# Altium PCB PX4FMUv2.4.6.PcbDoc (part 3 of 3)
Units mil, origin at the board's own origin, x right, y up, seen from the top; angles counter-clockwise.
Board outline 2756 x 1595 mil, 6 copper layers (Top, Ground, Horizontal, Vertical, Power, Bottom), stack 65.355 mil thick; 290 components, 261 nets, 1159 pads, 472 vias.
Unrouted connection lines stored in the file: 14.
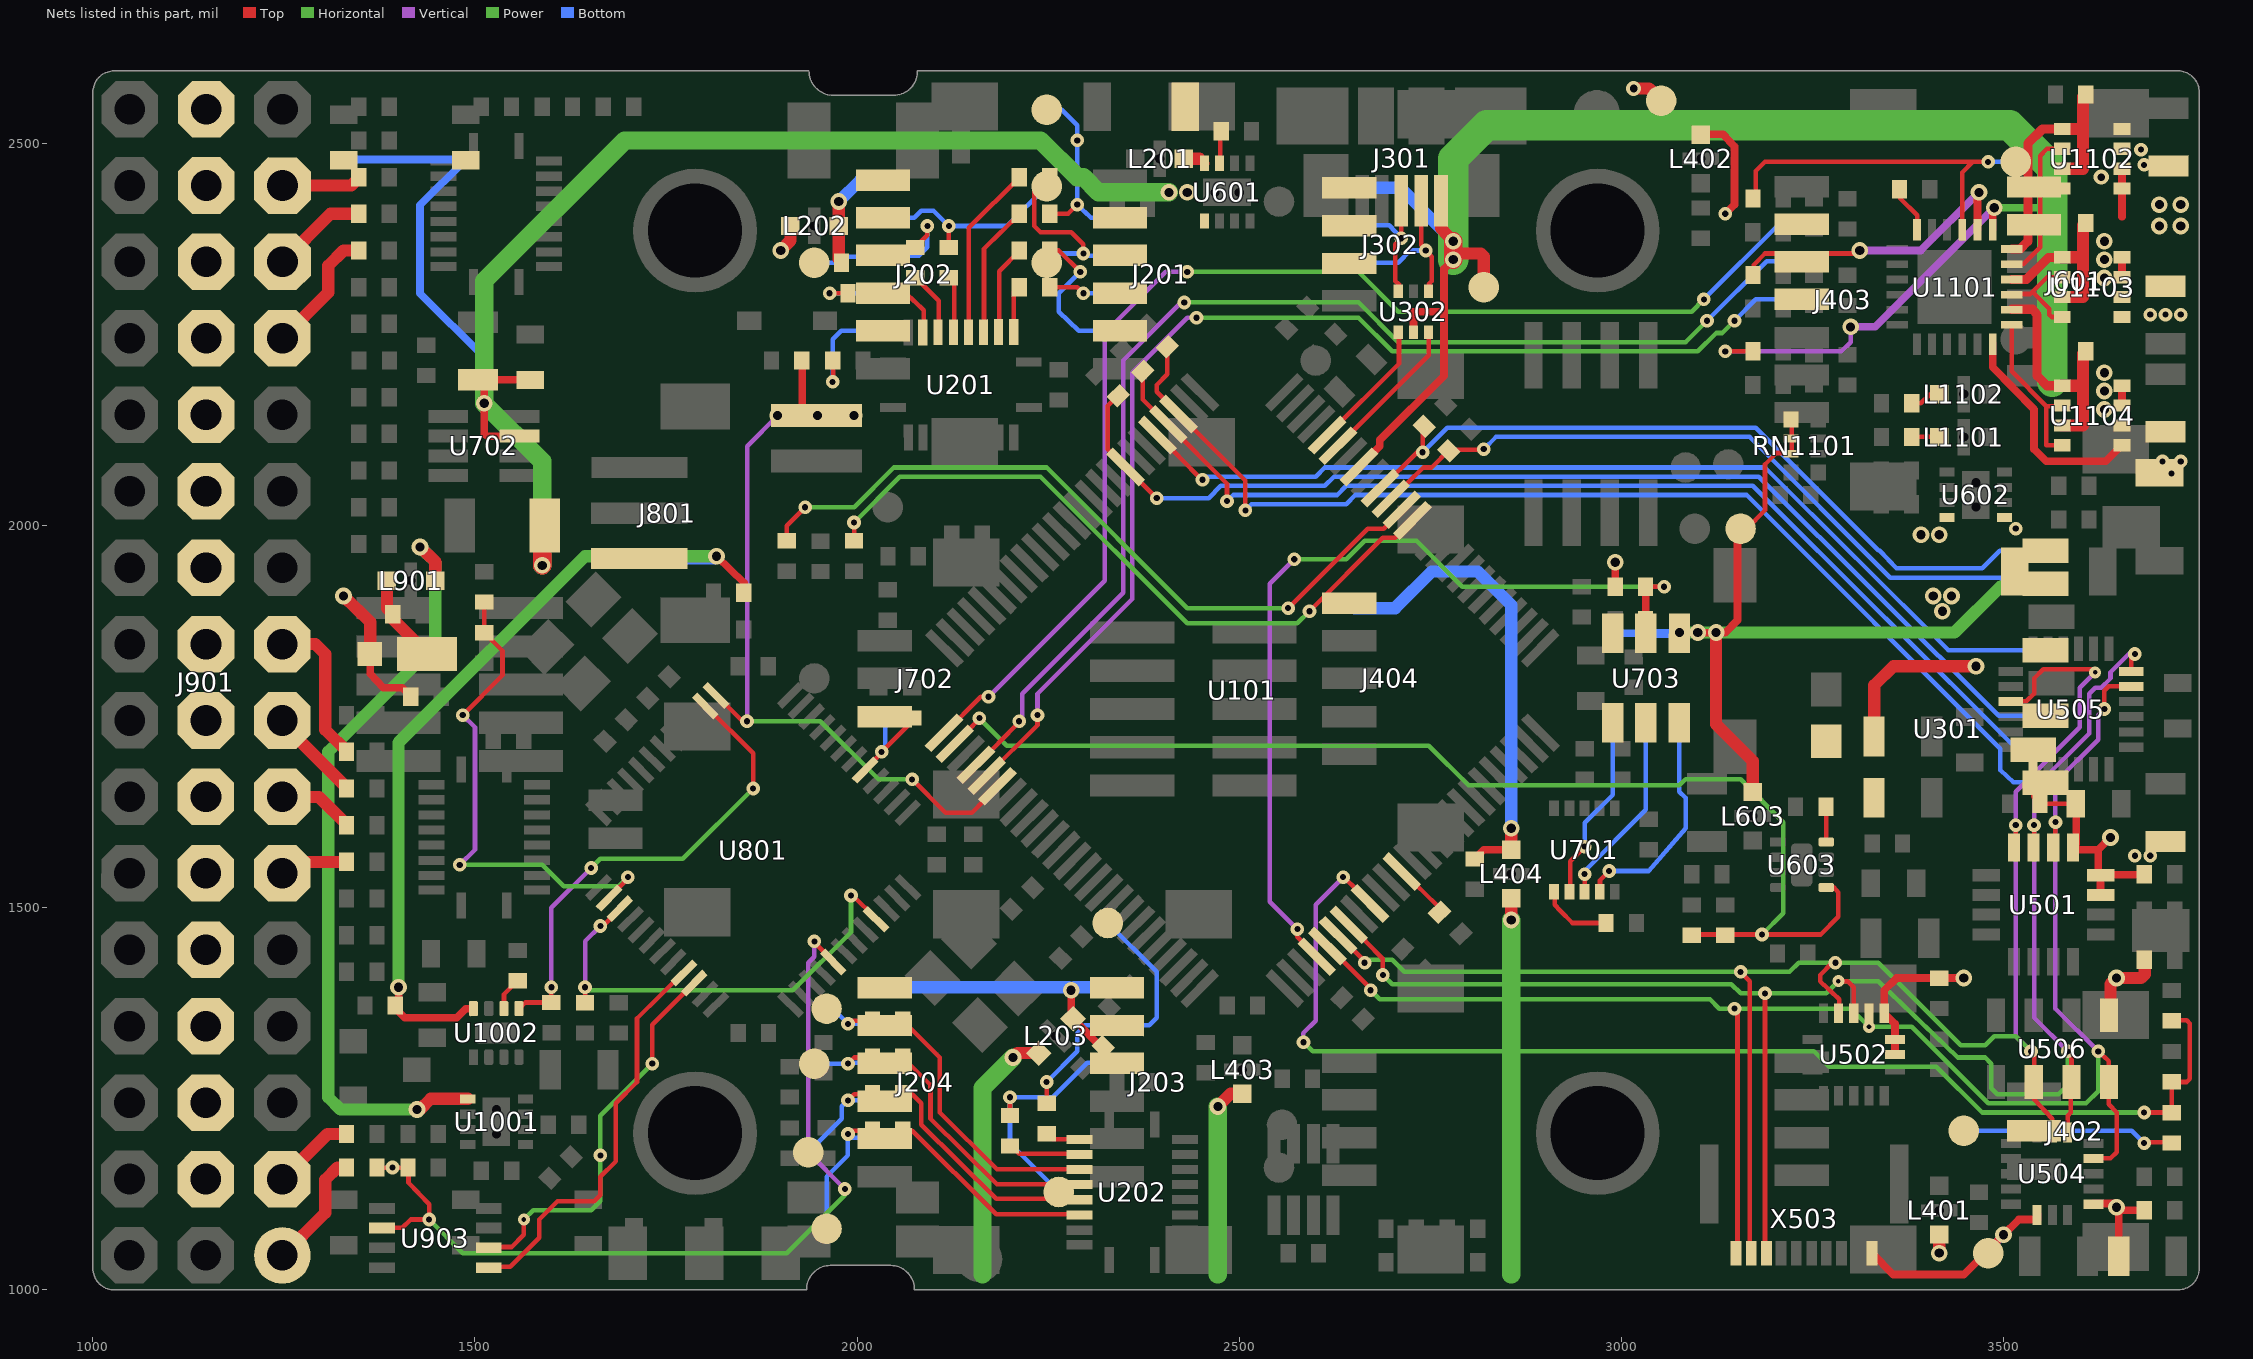
[diagram p7: the nets of this part, all layers, seen from the top]

## Via types
v1: diameter 17.84/17.84/17.84/17.84/17.84/17.84 (per signal layer), hole 8, Top to Bottom, 333 vias
v2: diameter 21.84/21.84/21.84/21.84/21.84/21.84 (per signal layer), hole 12, Top to Bottom, 129 vias
v3: diameter 15.84/15.84/15.84/15.84/15.84/15.84 (per signal layer), hole 6, Top to Bottom, 8 vias
v4: diameter 19.84/19.84/19.84/19.84/19.84/19.84 (per signal layer), hole 10, Top to Bottom, 2 vias

## Nets (pads, with @x,y where several pads share a name; then routed paths per layer and width w, separated by ;. In a path a pad name is that pad's centre, name@x,y a point inside that pad or via, vN(x,y) a via of type N, cw(c..) or ccw(c..) an arc to the next point about the centre after c; other vN are vias at no path point) (continued)
N$72: J901.16 R915.P$2 | length 91.2
  Top w16: J901.16@1247.96,1544.98 1263,1560 R915.P$2@1333,1560
N$73: J901.19 R907.P$2 | length 100.3
  Top w16: J901.19@1247.97,1644.98 1296,1645 R907.P$2@1333,1608
N$74: J901.22 R916.P$2 | length 124.2
  Top w16: J901.22@1247.99,1744.98 1248,1741 R916.P$2@1333,1656
N$75: J901.25 R908.P$2 | length 201.4
  Top w16: J901.25@1248.01,1844.98 1291,1845 1304,1832 1304,1733 R908.P$2@1333,1704
N$77: J901.37 R903.P$2 | length 169.1
  Top w16: J901.37@1248,2245 1308,2305 1308,2340 1328,2360 R903.P$2@1349,2360
N$78: J901.40 R912.P$2 | length 127.1
  Top w16: J901.40@1248,2345 1311,2408 R912.P$2@1349,2408
N$79: J901.43 R904.P$2 | length 105.6
  Top w16: J901.43@1248,2445 1338,2445 R904.P$2@1349,2456
N$82: R208.P$1 U201.18 | length 96.8
  Top w6: R208.P$1@2028,2304 2064,2304 2087,2282 U201.18@2087,2253
N$83: R202.P$1 U201.17 | length 84.8
  Top w6: R202.P$1@2076,2325 2107,2294 U201.17@2107,2253
N$84: R209.P$1 U201.16 | length 75.2
  Top w6: R209.P$1@2120,2325 2127,2319 U201.16@2127,2253
N$85: R203.P$1 U201.15 | length 231
  Top w6: U201.15@2146,2253 2146,2390 R203.P$1@2213,2456
N$86: R210.P$1 U201.14 | length 174.8
  Top w6: U201.14@2166,2253 2166,2362 R210.P$1@2213,2408
N$87: R204.P$1 U201.13 | length 118.2
  Top w6: U201.13@2186,2253 2186,2333 R204.P$1@2213,2360
N$88: R211.P$1 U201.12 | length 62.6
  Top w6: U201.12@2205,2253 2205,2305 R211.P$1@2213,2312
N$89: R207.P$1 U202.13 | length 96.3
  Top w6: R207.P$1@2200,1189 2212,1178 U202.13@2292,1178
N$90: R214.P$1 U202.12 | length 47.3
  Top w6: R214.P$1@2248,1205 2256,1197 U202.12@2292,1197
N$91: R205.P$1 U202.17 | length 276.9
  Top w6: R205.P$1@2060,1208 2072,1208 2182,1099 U202.17@2292,1099
N$92: R212.P$1 U202.16 | length 304.9
  Top w6: R212.P$1@2060,1256 2072,1256 2084,1244 2084,1216 2182,1119 U202.16@2292,1119
N$93: R206.P$1 U202.15 | length 326.2
  Top w6: R206.P$1@2060,1304 2096,1268 2096,1224 2183,1138 U202.15@2292,1138
N$94: R213.P$1 U202.14 | length 354.2
  Top w6: R213.P$1@2060,1352 2104,1308 2108,1304 2108,1232 2183,1158 U202.14@2292,1158
N$95: R704.P$2 U701.6 | length 96.3
  Top w6: U701.6@2913,1522 2913,1504 2920,1496 2936,1480 R704.P$2@2981,1480
N$96: R617.P$1 U601.7 | length 42.8
  Top w6: U601.7@2475,2474 2475,2514 R617.P$1@2477,2516
N$97: C1105.P$1 U1101.P$18 U1102.P$1 U1102.P$3 | length 359
  Top w12: U1101.P$18@3511,2362 3522,2362 3532,2372 3532,2500 3551,2519 U1102.P$1@3577,2519
  Top w16: U1102.P$3@3577,2467 3604,2467 3604,2519 ; U1102.P$1@3577,2519 3604,2519 ; C1105.P$1@3608,2564 3604,2561 3604,2519
N$98: D403.C J404.1 L404.P$2 | length 625.3
  Top w10: D403.C@2808,1564 2820,1576 L404.P$2@2855.99,1576
  Top w16: L404.P$2@2855.99,1576 v2(2856,1604)
  Bottom w16: 2645,1899 2651,1892 2704,1892 2752,1940 2812,1940 2856,1896 v2(2856,1604)
N$99: J901.4 R910.P$2 | length 109.4
  Top w16: J901.4@1248,1145 1307,1204 R910.P$2@1333,1204
N$100: D203.C J203.1 J204.1 L203.P$2 | length 400.9
  Top w10: v2(2280,1392) 2280,1357 2283,1355 2319,1318 D203.C@2322,1318
  Bottom w10: v2@2277,1396 v2(2280,1392)
  Bottom w16: 2037,1396 v2@2277,1396 ; v2(2280,1392) 2284,1396 2341,1396
N$101: D202.C J202.1 L202.P$2 | length 158.4
  Top w10: D202.C@1976,2349 D202.C@1980,2344 ; L202.P$2@1976,2392 L202.P$2@1976,2393
  Top w16: D202.C@1976,2349 L202.P$2@1976,2392 ; L202.P$2@1976,2393 v2(1976,2424)
  Bottom w10: 2030,2456 2035,2452
  Bottom w16: v2(1976,2424) 2004,2452 2035,2452
N$102: L1102.P$2 R1102.P$2 | length 42
  Top w6: R1102.P$2@3380,2160 3392,2160 3404,2172 L1102.P$2@3417,2172
N$103: L1101.P$2 R1101.P$2 | length 37
  Top w6: R1101.P$2@3380,2116 L1101.P$2@3417,2116
N$104: C1002.P$1 U1002.6 | length 44.5
  Top w6: U1002.6@1538,1368 1538,1387 C1002.P$1@1556,1405
N$105: R1115.P$2 U1101.P$24 | length 62.1
  Top w6: R1115.P$2@3365,2440 3365,2428 3387,2406 U1101.P$24@3387,2387
N$106: C1106.P$1 U1101.P$16 U1103.P$1 U1103.P$3 | length 231
  Top w10: 3604,2299 3604,2300
  Top w12: U1101.P$16@3511,2322 3530,2322 3559,2351 U1103.P$1@3577,2351
  Top w16: U1103.P$3@3577,2299 3604,2299 ; U1103.P$1@3577,2351 3604,2351 ; 3604,2300 3604,2351 ; C1106.P$1@3608,2396 3604,2393 3604,2351
N$107: C1107.P$1 U1101.P$14 U1104.P$1 U1104.P$3 | length 307.6
  Top w10: 3604,2131 3604,2132
  Top w12: U1101.P$14@3511,2283 3538,2283 3544,2276 3544,2196 3557,2183 U1104.P$1@3577,2183
  Top w16: U1104.P$3@3577,2131 3604,2131 ; U1104.P$1@3577,2183 3604,2183 ; 3604,2132 3604,2183 ; C1107.P$1@3608,2228 3604,2225 3604,2183
N$109: U1101.P$13 U1104.P$2 U1104.P$4 | length 219.4
  Top w6: U1101.P$13@3511,2263 3511,2202 3556,2156 ; U1104.P$4@3577,2105 3556,2105 3556,2156 ; U1104.P$2@3577,2157 3577,2156 3556,2156
N$110: D903.C D904.CATHODE L901.P$1 | length 118
  Top w10: D903.C@1393,1877 D903.C@1393,1884
  Top w16: L901.P$1@1385,1928 1385,1892 D903.C@1393,1884 ; D903.C@1393,1877 D904.CATHODE@1438,1832
N$113: U1101.P$15 U1103.P$2 U1103.P$4 | length 132.5
  Top w6: U1101.P$15@3511,2303 3535,2303 3538,2306 ; U1103.P$4@3577,2273 3563,2273 3560,2276 3560,2284 3538,2306 ; U1103.P$2@3577,2325 3557,2325 3538,2306
N$115: U1101.P$17 U1102.P$2 U1102.P$4 | length 228.3
  Top w6: U1101.P$17@3511,2342 3526,2342 3548,2364 3548,2440 ; U1102.P$4@3577,2441 3549,2441 3548,2440 ; U1102.P$2@3577,2493 3557,2493 3548,2484 3548,2440
OTG_DM1: J301.D- J302.3 U302.1 | length 236.8
  Top w6: J301.D-@2738,2426 2738,2367 v1(2744,2360) ; U302.1@2748,2307 2748,2316 2752,2320 2752,2352 v1(2744,2360) ; v1@2748,2357 v1(2744,2360)
  Bottom w6: 2645,2344 2708,2344 2724,2360 v1(2744,2360)
OTG_DP1: J301.D+ J302.2 U302.3 | length 207.5
  Top w6: U302.3@2709,2307 2709,2316 2704,2320 2704,2368 v1(2712,2376) ; J301.D+@2712,2426 v1(2712,2376) ; v1(2712,2376) 2709,2373 v1(2712,2376)
  Bottom w6: 2645,2393 2696,2393 v1(2712,2376)
OTG_FS_DM: U101.70 U302.6 | length 197.9
  Top w6: U101.70@2630,2105 2748,2223 U302.6@2748,2254
OTG_FS_DP: U101.71 U302.4 | length 173.5
  Top w6: U101.71@2616,2119 2709,2212 U302.4@2709,2254
PB2-BOOT1: R102.P$1 U101.37 | length 75
  Top w6: U101.37@2713,1548 2763,1499 R102.P$1@2763,1494
PPM-SBUS-PROT: J901.1 R909.P$2 | length 157.8
  Top w16: J901.1@1248,1045 1304,1101 1304,1144 1320,1160 R909.P$2@1333,1160
PPM_INPUT: D901.C R909.P$1 U801.29 U903.2 | length 1170.7
  Top w6: R909.P$1@1372,1160 v1(1392,1160) 1413,1160 1413,1140 1440,1112 v1(1440,1092) 1416,1092 1405,1081 U903.2@1379,1081 ; v1(1944,1456) 1944,1455 U801.29@1969,1430
  Horizontal w6: v1(1440,1092) 1484,1048 1908,1048 1984,1124 v1(1984,1132)
  Vertical w6: v1(1944,1456) 1944,1436 1936,1428 1936,1180 v1(1984,1132)
PRESSURE_SENS: C401.P$1 R403.P$2 R406.P$1 U101.34 | length 1626.9
  Top w6: v1(2636,1540) 2637,1540 U101.34@2672,1506 ; v1(3684,1232) 3685,1232 3720,1232 3720,1273 3721,1272 3740,1272 3744,1276 3744,1348 3740,1353 R403.P$2@3720,1353
  Horizontal w6: v1(2584,1324) 2596,1312 3252,1312 3272,1292 3412,1292 3472,1232 v1(3684,1232)
  Vertical w6: v1(2584,1324) 2584,1336 2600,1352 2600,1504 v1(2636,1540)
PRESSURE_SENS_IN: ADC_PR.P$1 J402.2 R406.P$2 | length 279
  Top w6: v1(3684,1192) 3685,1193 R406.P$2@3720,1193
  Bottom w6: 3448,1208 3541,1208 3668,1208 v1(3684,1192)
RGB_LED_3: U701.9 U703.C1 | length 298
  Top w6: U701.9@2972,1522 2972,1536 v1(2984,1548)
  Bottom w6: v1(2984,1548) 3036,1548 3084,1604 3084,1644 3076,1652 3076,1742
RGB_LED_4: U701.8 U703.C2 | length 253.1
  Top w6: U701.8@2952,1522 v1(2952,1544)
  Bottom w6: v1(2952,1544) 2952,1548 3032,1628 3032,1742
RGB_LED_14: U701.7 U703.C3 | length 243.2
  Top w6: U701.7@2933,1522 2933,1561 v1(2952,1580)
  Bottom w6: v1(2952,1580) 2952,1611 2989,1648 2989,1742
RSSI_IN: R901.P$1 U801.15 U801.33 | length 619.5
  Top w6: R901.P$1@1644,1376 v1(1644,1396) ; v1(1664,1476) 1667,1476 U801.15@1691,1500 ; v1(1992,1516) 1994,1516 U801.33@2025,1486
  Horizontal w6: v1(1644,1396) 1648,1392 1916,1392 1992,1468 v1(1992,1516)
  Vertical w6: v1(1644,1396) 1644,1456 v1(1664,1476)
SAFETY: J702.3 R713.P$1 U801.41 | length 142.1
  Top w6: U801.41@2011,1681 2032,1703 v1(2032,1704) 2072,1744 R713.P$1@2072,1749
  Bottom w6: v1(2032,1704) 2037,1709 2037,1751
SBUS_INPUT: U801.22 U903.6 | length 520.9
  Top w6: U903.6@1518,1056 1548,1056 1564,1072 v3(1564,1092) ; v1(1732,1296) 1732,1347 U801.22@1788,1403
  Horizontal w6: v3(1564,1092) 1576,1104 1652,1104 1664,1116 v1(1664,1176) 1664,1228 v1(1732,1296)
SBUS_OUTPUT: U801.21 U903.5 | length 536.9
  Top w6: U903.5@1518,1030 1546,1030 1584,1068 1584,1092 1608,1116 1656,1116 1664,1124 1664,1148 1684,1168 1684,1244 1712,1272 1712,1355 U801.21@1774,1416
SDIO_CK: U101.80 U301.5 | length 1292.1
  Top w6: U101.80@2393,2119 2451,2060 v1(2452,2060)
  Bottom w6: v1(2452,2060) 2456,2064 2600,2064 2612,2076 3188,2076 3428,1837 3555,1837
SDIO_CMD: R303.P$1 U101.83 U301.3 | length 1471.3
  Top w6: R303.P$1@2342,2171 2328,2157 2328,2100 2351,2077 v1(2392,2036)
  Bottom w6: v1(2392,2036) 2460,2036 2476,2052 2612,2052 2624,2064 2628,2064 3180,2064 3494,1751 3555,1751
SDIO_D0: R304.P$1 U101.65 U301.7 | length 968.5
  Top w6: U101.65@2699,2035 2741,2076 2752,2076 2775,2099 2819,2099 v1(2820,2100)
  Bottom w6: v1(2820,2100) 2836,2116 3168,2116 3352,1932 3496,1932 3505,1924 3555,1924
SDIO_D1: R305.P$1 U101.66 U301.8 | length 1024.5
  Top w6: U101.66@2685,2049 2733,2096 v1(2740,2096) 2740,2128 R305.P$1@2743,2131
  Bottom w6: v1(2740,2096) 2772,2128 3176,2128 3336,1968 3338,1967 3360,1944 3472,1944 3495,1967 3555,1967
SDIO_D2: R301.P$1 U101.78 U301.1 | length 1496
  Top w6: R301.P$1@2406,2235 2406,2198 2392,2184 2392,2175 2421,2146 2508,2059 v1(2508,2020)
  Bottom w6: v1(2508,2020) 2516,2028 2640,2028 2652,2040 3164,2040 3496,1708 3496,1680 3513,1664 3555,1664
SDIO_D3: R302.P$1 U101.79 U301.2 | length 1422.5
  Top w6: R302.P$1@2374,2203 2374,2165 2407,2132 2484,2055 v1(2484,2032)
  Bottom w6: v1(2484,2032) 2492,2040 2628,2040 2640,2052 3172,2052 3518,1707 3539,1707
SERIAL1_CTS: J201.4 R211.P$2 | length 95.3
  Top w6: R211.P$2@2252,2312 2288,2312 v1(2296,2304)
  Bottom w6: v1(2296,2304) 2344,2304
SERIAL1_RTS: J201.5 R204.P$2 | length 206.3
  Top w6: R204.P$2@2252,2360 2264,2360 v1(2292,2332)
  Bottom w6: v1(2292,2332) 2264,2304 2264,2280 2290,2255 2345,2255
SERIAL1_RX: J201.3 R203.P$2 S1RX.P$1 | length 261.5
  Top w6: R203.P$2@2252,2456 2232,2437 2232,2392 2240,2384 2280,2384 2296,2368 v1(2296,2356)
  Bottom w6: 2248,2344 2260,2356 v1(2296,2356) 2300,2353 2345,2353
SERIAL1_TX: J201.2 R210.P$2 S1TX.P$1 | length 257
  Top w6: R210.P$2@2252,2408 2276,2408 v1(2288,2420)
  Bottom w6: 2248,2544 2268,2544 2288,2524 v1(2288,2504) v1(2288,2420) 2306,2403 2345,2403
SERIAL2_CTS: J202.4 R208.P$2 | length 96
  Top w6: v1(1964,2304) R208.P$2@1989,2304
  Bottom w6: v1(1964,2304) 2034,2304 2035,2304
SERIAL2_RTS: J202.5 R201.P$2 | length 156
  Top w6: v1(1968,2188) 1969,2189 R201.P$2@1969,2216
  Bottom w6: v1(1968,2188) 1968,2244 1979,2255 2035,2255
SERIAL2_RX: J202.3 R202.P$2 S2RX.P$1 | length 218.9
  Top w6: R202.P$2@2075.99,2364 2092,2380 v1(2092,2392)
  Bottom w6: 1944,2344 1980,2344 1988,2352 2034,2352 2035,2353 2081,2353 2092,2364 v1(2092,2392)
SERIAL2_TX: J202.2 R209.P$2 S2TX.P$1 | length 274.6
  Top w6: R209.P$2@2119.99,2364 v1(2120,2392)
  Bottom w6: 2035,2403 2075,2403 2084,2412 2100,2412 v1(2120,2392) 2196,2392 2248,2444
SERIAL3_RX: J203.3 R207.P$2 S3RX.P$1 | length 334.1
  Top w6: R207.P$2@2199.99,1228 v1(2200,1252)
  Bottom w6: 2264,1128 2200,1192 v1(2200,1252) 2256,1252 2301,1297 2341,1297
SERIAL3_TX: J203.2 R214.P$2 S3TX.P$1 | length 371.4
  Top w6: R214.P$2@2247.99,1244 v1(2248,1272)
  Bottom w6: v1(2248,1272) 2288,1312 2288,1336 2298,1346 2341,1346 2382,1346 2392,1356 2392,1416 2328,1480
SERIAL4_RX: J204.3 R206.P$2 S4RX.P$1 | length 129.7
  Top w6: v1(1988,1296) 1996,1304 J204.3@2021,1304
  Bottom w6: 1944,1296 v1(1988,1296) 1989,1297 2037,1297
SERIAL4_TX: J204.2 R213.P$2 S4TX.P$1 | length 120.8
  Top w6: v1(1988,1348) 1992,1352 J204.2@2021,1352
  Bottom w6: 1960,1368 1968,1368 v1(1988,1348) 2035,1348 2037,1346
SERIAL5_RX: J204.5 R205.P$2 S5_RX.P$1 | length 221.1
  Top w6: v1(1988,1204) 1992,1208 J204.5@2021,1208
  Bottom w6: 1960,1080 1960,1148 1988,1176 v1(1988,1204) 1994,1199 2037,1199
SERIAL5_TX: J204.4 R212.P$2 S5_TX.P$1 | length 174.9
  Top w6: v1(1988,1248) 1996,1256 J204.4@2021,1256
  Bottom w6: 1936,1180 1980,1224 1980,1240 v1(1988,1248) 2036,1248 2037,1248
SERIAL_FMU_TO_IO: R804.P$2 U101.63 | length 915.3
  Top w6: R804.P$2@1995.99,1980 v1(1996,2004) ; v1(2592,1888) 2688,1984 2704,1984 U101.63@2727,2007
  Horizontal w6: v1(1996,2004) 2056,2064 2240,2064 2432,1872 2576,1872 v1(2592,1888)
SERIAL_IO_TO_FMU: R803.P$2 U101.64 | length 986.4
  Top w6: R803.P$2@1907.99,1980 1908,2000 v1(1932,2024) ; v1(2564,1892) 2668,1996 2689,1996 U101.64@2713,2021
  Horizontal w6: v1(1932,2024) 1996,2024 2048,2076 2248,2076 2432,1892 v1(2564,1892)
SPI_EXT_MISO: J403.3 U101.4 | length 1593.8
  Top w6: U101.4@2157,1687 2212,1743 v1(2212,1744)
  Horizontal w6: v1(2428,2292) 2656,2292 2708,2240 3084,2240 v1(3112,2268)
  Vertical w6: v1(2212,1744) 2216,1748 2216,1780 2348,1912 2348,2216 2424,2292 v1(2428,2292)
  Bottom w6: v1(3112,2268) 3190,2346 3237,2346
SPI_EXT_MOSI: J403.4 U101.5 | length 1558.9
  Top w6: U101.5@2170,1673 2236,1739 v1(2236,1752)
  Horizontal w6: v1(2444,2272) 2656,2272 2700,2228 3100,2228 3124,2252 3132,2252 v1(3148,2268)
  Vertical w6: v1(2236,1752) 2236,1780 2360,1904 2360,2200 2432,2272 v1(2444,2272)
  Bottom w6: v1(3148,2268) 3176,2296 3237,2296
SPI_EXT_SCK: J403.2 U101.1 | length 1630.7
  Top w6: U101.1@2115,1729 2162,1776 v1(2172,1776)
  Horizontal w6: v1(2432,2332) 2656,2332 2708,2280 3092,2280 v1(3108,2296)
  Vertical w6: v1(2172,1776) 2324,1928 2324,2252 2404,2332 v1(2432,2332)
  Bottom w6: v1(3108,2296) 3207,2395 3237,2395
SPI_INT_MISO: U101.31 U501.4 U502.4 U504.7 U505.9 U506.6 X503.9 | length 2293.4
  Top w6: U101.31@2630,1464 2664,1430 v1(2664,1428) ; v1(3156,1416) 3168,1404 3168,1060 3171,1058 X503.9@3171,1048 ; v1(3280,1428) 3276,1428 3260,1412 3260,1404 3285,1380 U502.4@3285,1362 ; U505.9@3510,1770 3530,1770 3540,1780 3540,1800 3552,1812 3616,1812 v3(3620,1808) ; U501.4@3516,1577 3514,1579 3516,1582 v1(3516,1608) ; v1(3536,1312) 3540,1309 3540,1273 3540,1249 3564,1224 U504.7@3564,1206
  Horizontal w6: v1(2664,1428) 2668,1432 2700,1432 2716,1416 v1(3156,1416) 3220,1416 3232,1428 v1(3280,1428) 3336,1428 3444,1320 3476,1320 3488,1332 3516,1332 v1(3536,1312)
  Vertical w6: v1(3536,1312) 3516,1332 v1(3516,1608) 3516,1652 3600,1736 3600,1788 v3(3620,1808)
SPI_INT_MOSI: U101.32 U501.3 U502.3 U504.6 U505.24 U506.7 X503.8 | length 2294.7
  Top w6: U101.32@2644,1478 2688,1433 v1(2688,1412) ; v1(3188,1388) 3188,1060 3191,1058 X503.8@3191,1048 ; v3(3284,1404) 3296,1404 3304,1396 U502.3@3304,1362 ; U501.3@3540,1584 3540,1579 3540,1580 v1(3540,1608) ; U504.6@3584,1206 3584,1228 3588,1232 3588,1273 3589,1273 3589,1308 v1(3584,1312) ; U505.24@3667,1810 3667,1827 v1(3672,1832)
  Horizontal w6: v1(2688,1412) 2700,1400 3144,1400 3156,1388 v1(3188,1388) 3268,1388 v3(3284,1404) 3336,1404 3440,1304 3476,1304 3484,1296 3484,1264 3492,1256 3572,1256 3584,1268 v1(3584,1312)
  Vertical w6: v1(3584,1312) 3540,1356 v1(3540,1608) 3540,1656 3612,1728 3612,1780 3620,1788 3628,1788 3640,1800 3640,1808 3664,1832 v1(3672,1832)
SPI_INT_SCK: U101.30 U501.2 U502.2 U504.4 U505.23 U506.8 X503.10 | length 2261.7
  Top w6: U101.30@2616,1450 2672,1394 v1(2672,1392) ; v1(3148,1368) 3152,1364 3152,1064 3151,1063 X503.10@3151,1048 ; v3(3324,1344) 3324,1345 U502.2@3324,1362 ; U501.2@3565,1579 3568,1583 v1(3568,1612) ; U504.4@3618,1172 3640,1172 3648,1180 3648,1232 3638,1243 3638,1273 3638,1299 v1(3624,1312) ; v1(3632,1760) 3632,1784 3638,1790 U505.23@3667,1790
  Horizontal w6: v1(2672,1392) 2684,1380 3116,1380 3128,1368 v1(3148,1368) 3300,1368 v3(3324,1344) 3380,1344 3480,1244 3608,1244 3624,1260 v1(3624,1312)
  Vertical w6: v1(3624,1312) 3568,1368 v1(3568,1612) 3568,1664 3624,1720 3624,1752 v1(3632,1760)
VBAT: B601.1 R608.P$1 U101.6 U801.1 | length 1037.6
  Top w6: U801.1@1816,1778 1850,1744 v1(1856,1744) ; v2(1896,2144) 1924,2144 1946,2144 1947,2143 v2(1948,2144) v2(1996,2144) ; v1(2072,1668) 2116,1624 2150,1624 U101.6@2184,1659
  Top w10: B601.1@1924,2144 1928,2148 R608.P$1@1928,2216
  Horizontal w6: v1(1856,1744) 1952,1744 2028,1668 v1(2072,1668)
  Vertical w6: v1(1856,1744) 1856,2104 v2(1896,2144)
VBUS: C1103.P$1 J301.VBUS J302.1 R1112.P$1 U101.68 U302.5 U1101.P$19 U1104.P$7 U1104.P$8 VBUS.P$1 | length 2570.3
  Top w6: v1(3136,2228) R1112.P$1@3173,2228
  Top w10: U101.68@2658,2077 2684,2104 2684,2112 2768,2196 2768,2280 ; U302.5@2728,2254 2728,2280 2768,2280 ; v2(2780,2348) 2768,2336 2768,2280 ; U1101.P$19@3486,2387 3486,2414 v2(3488,2416) ; U1104.P$7@3655,2157 U1104.P$8@3655,2183
  Top w16: J301.VBUS@2764,2426 2764,2389 v2(2780,2372) ; v2(2780,2348) 2788,2356 2816,2356 2820,2352 VBUS.P$1@2820,2312
  Top w24: v2(2780,2348) v2(2780,2372)
  Horizontal w10: v2(3488,2416) 3560,2416 3564,2412
  Horizontal w40: v2(2780,2348) 2780,2480 2824,2524 3508,2524 3564,2468 3564,2412 3564,2188
  Vertical w6: v1(3136,2228) 3288,2228 3300,2240 v2(3300,2260)
  Vertical w10: v2(3300,2260) 3332,2260 v2(3488,2416)
  Bottom w16: 2645,2442 2711,2442 v2(2780,2372)
  other v2: 3632,2152 3632,2176 3632,2200
VDD_3V3_SENSORS: C501.P$1 C502.P$1 C503.P$1 C506.P$1 C507.P$1 C508.P$1 C511.P$1 C513.P$1 C514.P$1 C605.P$1 C617.P$1 R621.2 U501.1 U501.15 U501.16 U502.1 U502.15 U502.16 U504.1 U504.14 U505.13 U506.1 U603.8 VDDA_3V1101.P$1 X503.1 | length 1357.6
  Top w6: U603.8@3268,1586 C617.P$1@3268,1632 ; U505.13@3539,1682 3539,1645 3548,1636 C513.P$1@3595,1636 ; U501.1@3591,1579 U501.1@3595,1583
  Top w10: X503.1@3328,1048 3356,1020 3448,1020 v2(3500,1072) 3520,1092 3545,1092 U504.14@3545,1099 ; U502.15@3358,1308 3358,1328 3358,1348 3344,1362 3344,1363 3344,1392 3360,1408 3416,1408 3417,1408 v2(3448,1408) ; U501.1@3591,1579 3591,1576 3624,1576 ; U501.1@3595,1583 C513.P$1@3595,1636 ; U504.1@3618,1113 3644,1113 v2(3648,1108) ; U501.15@3627,1517 U501.16@3627,1543 ; U506.1@3638,1360 U506.1@3638,1370 ; v2(3640,1592) 3624,1576 ; C506.P$1@3651,1044 3651,1106 v2(3648,1108) ; C507.P$1@3685,1104 3652,1104 v2(3648,1108) ; C502.P$1@3685,1544 3683,1543 U501.16@3627,1543 ; 3624,1576 3624,1543 U501.16@3627,1543
  Top w12: C605.P$1@3331,1644 C605.P$1@3331,1656
  Top w16: C501.P$1@3331,1724 3331,1791 3356,1816 v2(3464,1816) ; U506.1@3638,1360 3640,1362 3640,1400 v2(3648,1408) 3680,1408 3685,1413 C508.P$1@3685,1432
  Bottom w10: 3480,1048 3480,1052 v2(3500,1072)
  other v1: 3672,1568 3692,1568
VDD_3V3_SENSORS_EN: R603.P$2 R635.P$2 U101.2 U603.5 | length 1572.9
  Top w6: U101.2@2129,1715 2160,1747 v1(2160,1748) ; R635.P$2@3092,1465 3136,1465 v1(3184,1465) 3261,1465 3284,1488 3284,1520 3278,1527 U603.5@3268,1527
  Horizontal w6: v1(2160,1748) 2196,1712 2748,1712 2800,1660 3076,1660 3084,1668 3156,1668 3212,1612 3212,1493 v1(3184,1465)
  Vertical w6: v1@3184,1464 v1(3184,1465)
VDD_3V3_SPEKTRUM: C1008.P$1 D801.C J801.P$1 U1002.8 | length 1146.5
  Top w8: C1008.P$1@1396,1372 C1008.P$1@1400,1368
  Top w10: v2(1400,1396) 1400,1368 1400,1364 1408,1356 1476,1356 1488,1368 U1002.8@1499,1368 ; v2(1816,1960) 1852,1925 D801.C@1852,1912
  Power w16: v2(1400,1396) 1400,1716 1644,1960 v2(1816,1960)
  Bottom w16: 1716,1957 1813,1957 v2(1816,1960)
VDD_3V3_SPEKTRUM_EN: R1002.P$2 U801.2 U1002.5 | length 631.6
  Top w6: U1002.5@1558,1368 1566,1376 R1002.P$2@1599.99,1376 v1(1600,1396) ; U801.2@1802,1764 1864,1702 v1(1864,1656)
  Horizontal w6: v1(1652,1552) 1664,1564 1772,1564 v1(1864,1656)
  Vertical w6: v1(1600,1396) 1600,1500 v1(1652,1552)
VDD_5V_BRICK: C1101.P$1 J601.1 J601.2 R1105.P$1 U1101.P$21 U1102.P$7 U1102.P$8 VDD_5V_BRICK.P$1 | length 480.4
  Top w6: R1105.P$1@3173,2428 3176,2432 3176,2464 3188,2476 3460,2476 ; U1101.P$21@3446,2387 3446,2462 3460,2476 ; v1(3480,2476) 3460,2476
  Top w16: C1101.P$1@3714,2468 C1101.P$1@3716,2471
  Bottom w6: v1(3480,2476) 3516,2476
  other v1: 3684,2472 3680,2492
  other v4: 3628,2456
VDD_5V_HIPOWER: C614.P$1 L201.P$1 U601.8 | length 29.2
  Top w12: 2448,2480 U601.8@2455,2474
  Top w16: L201.P$1@2428,2480 2448,2480
VDD_5V_IN: C702.P$1 C1104.P$1 F1001.1 L603.P$1 L701.P$1 LED701.A LED704.A R609.P$2 RN1101.5 RN1101.6 RN1101.7 U601.1 U602.1 U702.3 U703.A1 U703.A2 U703.A3 U1101.P$12 U1102.P$5 U1102.P$6 U1103.P$5 U1103.P$6 U1104.P$5 U1104.P$6 VDD_5V_IN.P$1 | length 3734.4
  Top w6: VDD_5V_IN.P$1@3156,1996 3164,1996 3188,2020 3188,2080 3203,2095 3223,2095 3223,2114 RN1101.5@3223,2139
  Top w10: U702.3@1559,2117 1516,2117 1512,2120 v2(1512,2160) 1512,2183 1504,2191 C702.P$1@1572,2191 ; v2(2992,1952) R609.P$2@2992,1920 R609.P$2@2993,1920 ; v2(3076,1860) v2(3124,1860) 3136,1860 3152,1876 3152,1992 VDD_5V_IN.P$1@3156,1996 ; U1101.P$12@3486,2238 3486,2207 3540,2152 3540,2100 3556,2084 3634,2084 U1104.P$5@3655,2105 U1104.P$5@3655,2104 ; 3655,2404 U1102.P$5@3655,2441 ; 3655,2432 U1102.P$6@3655,2467
  Top w16: v2(3124,1860) 3124,1740 3172,1692 L603.P$1@3172,1652
  Top w24: v2(1588,1948) 1588,1997 F1001.1@1592,2000
  Horizontal w16: v2(3076,1860) 3436,1860 3496,1920
  Power w24: v2(1588,1948) 1588,2084 v2(1512,2160) 1512,2320 1696,2504 2240,2504 2288,2456 2296,2456 2316,2436 v2(2408,2436)
  Bottom w10: 1328,2479 1488,2479 1428,2419 1428,2304 1512,2220 v2(1512,2160) ; 2989,1859 3032,1859
  Bottom w12: 3032,1859 v2@3076,1859
  other v1: 3516,1996 3720,2068 3708,2084 3732,2084 3692,2276 3712,2276 3732,2276
  other v2: 3100,1860 3704,2392 3732,2392 3704,2420 3732,2420 2432,2436
VDD_5V_PERIPH: C618.P$1 L202.P$1 L203.P$1 L401.P$1 L402.P$1 L403.P$1 L404.P$1 U602.8 | length 1295.4
  Top w10: L402.P$1@3104,2512 3133,2512 3148,2496 3148,2420 v1(3136,2408)
  Top w16: v2(1900,2360) 1913,2373 L202.P$1@1913,2392 ; v2(2204,1304) 2210,1310 L203.P$1@2238,1310 ; v2(2472,1240) 2489,1257 L403.P$1@2504,1257 ; v2(2856,1484) L404.P$1@2856,1513 ; v2(3416,1048) L401.P$1@3416,1073
  Power w24: 2164,1020 2164,1264 v2(2204,1304) ; 2472,1020 v2(2472,1240) ; 2856,1020 v2(2856,1484)
  other v2: 3420,1888 3408,1908 3432,1908 3392,1988 3416,1988
VDD_5V_SENS: R609.P$1 R610.P$1 U101.29 | length 1145
  Top w6: v1(2576,1472) 2576,1462 U101.29@2602,1437 ; R609.P$1@3032,1920 v1(3056,1920)
  Top w10: R610.P$1@3032,1876 R609.P$1@3032,1920
  Horizontal w6: v1(2572,1956) 2640,1956 2664,1980 2732,1980 2792,1920 v1(3056,1920)
  Vertical w6: v1(2572,1956) 2540,1924 2540,1508 v1(2576,1472)
VDD_SERVO: C1102.P$1 D904.ANODE J901.5 J901.8 J901.11 J901.14 J901.17 J901.20 J901.23 J901.26 J901.29 J901.32 J901.35 J901.38 J901.41 J901.44 J901.47 R922.P$2 R1109.P$1 U1101.P$20 U1103.P$7 U1103.P$8 VDD_SERVO.P$1 | length 649.3
  Top w6: R1109.P$1@3173,2328 3173,2341 3188,2356 3308,2356 v2(3312,2360)
  Top w10: D904.ANODE@1363,1832 1363,1806 1380,1788 1405,1788 R922.P$2@1417,1776 ; U1101.P$20@3466,2387 3466,2434 v2(3468,2436) ; U1103.P$7@3655,2325 U1103.P$8@3655,2351
  Top w16: v2(1328,1908) 1363,1874 D904.ANODE@1363,1832 ; v4(3016,2572) 3036,2572 VDD_SERVO.P$1@3052,2556
  Vertical w10: v2(3312,2360) 3392,2360 v2(3468,2436)
  other v2: 3632,2324 3632,2348 3632,2372
VDD_SERVO_IN: L901.P$2 U1001.1 | length 1034.3
  Top w16: v2(1424,1236) 1428,1236 1442,1250 U1001.1@1491,1250 ; v2(1428,1972) 1448,1953 L901.P$2@1448,1928
  Power w16: v2(1424,1236) 1324,1236 1308,1252 1308,1704 1448,1844 1448,1952 v2(1428,1972)
VDD_SERVO_SENS: R918.P$1 R919.P$2 U801.14 | length 663.2
  Top w6: v1(1484,1752) 1536,1804 1536,1836 1512,1860 R919.P$2@1512,1901 ; U801.14@1677,1514 1700,1538 v1(1700,1540)
  Horizontal w6: v1(1480,1556) 1588,1556 1616,1528 1688,1528 v1(1700,1540)
  Vertical w6: v1(1480,1556) 1500,1576 1500,1736 v1(1484,1752)
pads on no net: J201.M$0 J201.M$1 J202.M$0 J202.M$1 J203.M$0 J203.M$1 J204.M$0 J204.M$1 J301.GND5 J301.GND6 J301.ID J302.M$0 J302.M$1 J401.M$0 J401.M$1 J402.M$0 J402.M$1 J403.M$0 J403.M$1 J404.M$0 J404.M$1 J405.M$0 J405.M$1 J601.M$0 J601.M$1 J701.M$0 J701.M$1 J702.M$0 J702.M$1 J801.P$4 J801.P$5 JP1.1 JP2.1 JX301.7 JX301.8 JX301.10 JX802.7 JX802.8 JX802.10 M3_MOUNT1101.P$1 M3_MOUNT1102.P$1 M3_MOUNT1103.P$1 M3_MOUNT1104.P$1 RN1101.1 RN1101.8 S601.A2 S601.B4 S801.A2 S801.B4 U101.16 U202.1 U202.3 U202.18 U202.20 U301.NC U301.NC1 U301.NC2 U301.NC3 U501.7 U502.7 U502.8 U505.2 U505.3 U505.4 U505.5 U505.6 U505.7 U505.11 U505.14 U505.15 U505.16 U505.17 U505.19 U505.21 U505.22 U506.4 U601.3 U602.3 U801.3 U801.4 U801.25 U801.32 U801.42 U801.43 U901.8 U901.9 U901.12 U901.13 U1001.3 U1101.P$11 U1101.P$22 U1101.P$23 X503.P$11 X503.P$12
copper on no net: | length 1.1
  Bottom w6: 2344,2304 cw(c2344.5,2303.5) 2345,2304

## Polygon pours and split planes (outlines as drawn)
VBUS on Top "Top-VBUS" (solid, remove dead copper, pour order 0): 3625,2145 3670.76,2145 3681,2134.76 3681,2106.76 3686.76,2101 3755,2101 3755,2145.24 3749.24,2151 3697.24,2151 3679,2169.24 3679,2197.24 3669.24,2207 3625,2207
GND on Top "Top-GND" (solid, remove dead copper, pour order 12): 1011,2589 1089,2589 1089,1003 1011,1003
GND on Top "Top-GND 1" (solid, remove dead copper, pour order 18): 3681,2255 3743,2255 3743,2173 3681,2173
GND on Top "Top-GND 2" (solid, remove dead copper, pour order 20): 3602.76,2071 3641.24,2071 3651,2061.24 3651,1998.76 3641.24,1989 3602.76,1989 3593,1998.76 3593,2061.24
GND on Top "Top-GND 3" (solid, remove dead copper, pour order 22): 3602.76,1979 3745.24,1979 3751,1973.24 3751,1898.76 3745.24,1893 3602.76,1893 3597,1898.76 3597,1973.24
GND on Top "Top-GND 4" (solid, remove dead copper, pour order 24): 3373,1777.24 3373,1625.24 3349,1601.24 3349,1434.76 3358.76,1425 3425.24,1425 3431,1430.76 3431,1777.24 3421.24,1787 3382.76,1787
GND on Top "Top-GND 5" (solid, remove dead copper, pour order 26): 3034.77,2395.02 3325.26,2390.98 3331,2385.24 3331,2134.76 3325.23,2128.98 3034.74,2133.02 3024.98,2142.78 3029.02,2389.26
GND on Top "Top-GND 6" (solid, remove dead copper, pour order 28): 2110.76,2433 2461.24,2433 2479,2450.76 2479,2595 2105.08,2595 2100.97,2442.79
GND on Top "Top-GND 7" (solid, remove dead copper, pour order 30): 3053,1707 3247,1707 3247,1521 3053,1521
GND on Top "Top-GND 8" (solid, remove dead copper, pour order 32): 3648,1660 3670.34,1660 3680,1669.66 3680,1693.66 3694.34,1708 3737.66,1708 3748,1697.66 3748,1618.34 3737.66,1608 3642.34,1608 3636,1614.34 3636,1653.66 3642.34,1660
GND on Top "Top-GND 9" (solid, remove dead copper, pour order 34): 3311,1766.76 3305.24,1761 3246.76,1761 3241,1766.76 3241,1825.24 3250.76,1835 3297.24,1835 3311,1821.24
FMU-VDD_3V3 on Top "Top-FMU-VDD_3V3" (solid, remove dead copper, pour order 38): 3253,1579 3298.76,1579 3301,1581.24 3301,1589.24 3310.76,1599 3345.24,1599 3351,1593.24 3351,1438.76 3341.24,1429 3310.76,1429 3301,1438.76 3301,1550.76 3298.76,1553 3253,1553
VDD_5V_IN on Top "Top-VDD_5V_IN" (solid, remove dead copper, pour order 40): 3643,2441 3753,2441 3753,1887 3463,1887 3463,2017 3643,2017 3643,2141 3679,2141 3679,2239 3643,2239 3643,2309 3679,2309 3679,2387 3643,2387
VDD_5V_IN on Top "Top-VDD_5V_IN 1" (solid, remove dead copper, pour order 50): 2399,2445 2399,2387 2461,2387 2461,2445
VDD_5V_IN on Top "Top-VDD_5V_IN 2" (solid, remove dead copper, pour order 54): 3055,1889 3177,1889 3177,1811 3055,1811
VDD_5V_PERIPH on Top "Top-VDD_5V_PERIPH" (solid, remove dead copper, pour order 58): 3437,2021 3437,1975 3379,1975 3379,2021
VDD_5V_PERIPH on Top "Top-VDD_5V_PERIPH 1" (solid, remove dead copper, pour order 60): 3382.76,1955 3462.76,1955 3494.76,1987 3537.24,1987 3543,1981.24 3543,1866.76 3537.24,1861 3382.76,1861 3377,1866.76 3377,1949.24
VDD_3V3_SENSORS on Top "Top-VDD_3V3_SENSORS" (solid, remove dead copper, pour order 64): 3371,1737.24 3371,1618.76 3349.24,1597 3309.24,1597 3285.24,1573 3254.76,1573 3249,1578.76 3249,1737.24 3258.76,1747 3361.24,1747
VDD_3V3_SENSORS on Top "Top-VDD_3V3_SENSORS 1" (solid, remove dead copper, pour order 66): 3625.24,1611 3741.24,1611 3747,1605.24 3747,1530.76 3741.24,1525 3566.76,1525 3549,1542.76 3549,1641.24 3566.76,1659 3605.24,1659 3619,1645.24 3619,1617.24
VDD_3V3_SENSORS on Top "Top-VDD_3V3_SENSORS 2" (solid, remove dead copper, pour order 68): 3307,1747 3246.76,1747 3241,1741.24 3241,1710.76 3245,1706.76 3245,1690.76 3250.76,1685 3307,1685
IO-VDD_3V3 on Top "Top-IO-VDD_3V3" (solid, remove dead copper, pour order 72): 1527,1358.76 1527,1409.24 1521.24,1415 1485.24,1415 1471,1429.24 1471,1457.24 1465.24,1463 1430.76,1463 1425,1457.24 1425,1374.76 1430.76,1369 1469.24,1369 1485.24,1385 1506.76,1385 1509,1382.76 1509,1358.76 1514.76,1353 1521.24,1353
VDD_5V_HIPOWER on Top "Top-VDD_5V_HIPOWER" (solid, remove dead copper, pour order 74): 2405,2576 2405,2458.76 2410.76,2453 2445.24,2453 2451,2458.76 2451,2581.24 2445.24,2587 2410.76,2587 2405,2581.24
FMU-VDD_5V5 on Top "Top-FMU-VDD_5V5" (solid, remove dead copper, pour order 82): 3088,1607 3209.24,1607 3223,1593.24 3223,1498.76 3209.24,1485 3078.76,1485 3065,1498.76 3065,1593.24 3078.76,1607
VDD_SERVO on Top "Top-VDD_SERVO" (solid, remove dead copper, pour order 86): 3620.79,2313 3670.76,2313 3686.76,2297 3743,2297 3743,2357.24 3721.24,2379 3625.19,2379
VDD_SERVO on Top "Top-VDD_SERVO 1" (solid, remove dead copper, pour order 88): 1107,2589 1189,2589 1189,1099 1107,1099
VDD_5V_BRICK on Top "Top-VDD_5V_BRICK" (solid, remove dead copper, pour order 92): 3625,2453 3747,2453 3747,2493.24 3737.24,2503 3693.24,2503 3687,2509.24 3687,2531 3625,2531
VBUS on Horizontal "Horizontal-VBUS" (solid, remove dead copper, pour order 2): 3543,2135 3638.07,2135 3649,2145.93 3649,2206.07 3638.07,2217 3543,2217
VDD_5V_IN on Horizontal "Horizontal-VDD_5V_IN" (solid, remove dead copper, pour order 52): 3554.76,2579 3741.24,2579 3755,2565.24 3755,1890.76 3741.22,1876.98 3490.74,1881.02 3477,1894.76 3477,2025.24 3490.76,2039 3530.76,2039 3541,2049.24 3541,2565.24
GND on Ground "Ground-GND" (solid, remove dead copper, pour order 4): 3757,2601 995,2601 995,1001 ccw(c1001,1001) 1001,995 3092,995 3092,1379 3421,1379 3421,1907 3699,1907 3699,1885 3443,1885 3443,1370 3104,1370 3104,995 3757,995
GND on Bottom "Bottom-GND" (solid, remove dead copper, pour order 6): 1299,1139 1299,1597 1709,1597 1709,1139
GND on Bottom "Bottom-GND 1" (solid, remove dead copper, pour order 8): 3577,2183 3387,2183 3387,2289 3493,2289 3493,2261 3577,2261
GND on Bottom "Bottom-GND 2" (solid, remove dead copper, pour order 10): 1011,2589 1089,2589 1089,1007 1011,1007
GND on Bottom "Bottom-GND 3" (solid, remove dead copper, pour order 14): 3199,1523 3199,1578.07 3215.03,1594.1 3223.07,2137 3693,2137 3693,1575.05 3298.09,1571.02 3281,1553.93 3281,1533.93 3270.07,1523
GND on Bottom "Bottom-GND 4" (solid, remove dead copper, pour order 16): 2379,2207 2379,2593 2793,2593 2793,2207
VDD_5V_IN on Bottom "Bottom-VDD_5V_IN" (solid, remove dead copper, pour order 44): 3005,1815 2851,1815 2851,2029 3005,2029
VDD_5V_IN on Bottom "Bottom-VDD_5V_IN 1" (solid, remove dead copper, pour order 46): 3015,1815 3015,2029 3049,2029 3049,1815
VDD_5V_IN on Bottom "Bottom-VDD_5V_IN 2" (solid, remove dead copper, pour order 48): 3059,1815 3059,2029 3217,2029 3217,1815
RGB_LED_3 on Bottom "Bottom-RGB_LED_3" (solid, remove dead copper, pour order 76): 3059,1785 3059,1579 3217,1579 3217,1785
RGB_LED_4 on Bottom "Bottom-RGB_LED_4" (solid, remove dead copper, pour order 78): 3015,1785 3015,1579 3049,1579 3049,1785
RGB_LED_14 on Bottom "Bottom-RGB_LED_14" (solid, remove dead copper, pour order 80): 3005,1785 3005,1579 2851,1579 2851,1785
VDD_SERVO on Bottom "Bottom-VDD_SERVO" (solid, remove dead copper, pour order 90): 1107,2589 1189,2589 1189,1099 1107,1099
VDD_5V_BRICK on Bottom "Bottom-VDD_5V_BRICK" (solid, remove dead copper, pour order 94): 3503,2379 3689,2379 3689,2493 3503,2493
FMU-VDD_3V3 on Power "Power-FMU-VDD_3V3" (solid, remove dead copper, pour order 36): 2131,1047 2131,1669.93 1829.93,1971 1551,1971 1551,2333 2685,2333 2685,2213 3317,2213 3317,1047
VDD_5V_IN on Power "Power-VDD_5V_IN" (solid, remove dead copper, pour order 42): 2363,2439 3499,2439 3499,2379 3757,2379 3757,2597 2363,2597
VDD_5V_PERIPH on Power "Power-VDD_5V_PERIPH" (solid, remove dead copper, pour order 56): 3433,995 3433,2433 1883,2433 1883,2343 2691,2343 2691,2223 3323,2223 3323,1037 2131,1037 2131,995
VDD_3V3_SENSORS on Power "Power-VDD_3V3_SENSORS" (solid, remove dead copper, pour order 62): 3757,995 3757,1885 3443,1885 3443,995
IO-VDD_3V3 on Power "Power-IO-VDD_3V3" (solid, remove dead copper, pour order 70): 1299,1949 1299,995 2109,995 2109,1658.07 1818.07,1949
VDD_SERVO on Vertical "Vertical-VDD_SERVO" (solid, remove dead copper, pour order 84): 3757,2601 3757,2279 3609.93,2279 3453.93,2435 1782.07,2435 1690.07,2343 1474.07,2343 1357,2225.93 1357,1879 1103,1879 1103,2601

## Keep-outs
Keep-Out Layer:
  the board outline again, w0

## Silkscreen, mask and mechanical layers (free items; w line width, h text height)
Top Overlay:
  lines w20: 3480,1864 3608,1880 ; 3480,1896 3576,1880 ; 3528,1880 3464,1880 ; 3464,1880 3464,1848 3688,1880 3464,1912 3464,1880
  text "PX4FMU v2.4.5" at 2312,2312 h34
Bottom Overlay:
  circle w12: c2941,2105 r26
  circle w10: c1650,1089 r60
  circle w10: c1489,1089 r60
  circle w10: c1327,1089 r60
  circle w10: c1327,2506 r60
  circle w10: c1489,2506 r60
  lines w10: 2900,1709 ccw(c2939,1709) 2939,1670 3126,1670 ccw(c3126.5,1709.5) 3166,1709 3166,1896 ccw(c3126,1896) 3126,1936 2939,1936 ccw(c2939.5,1896.5) 2900,1896 2900,1709
  lines w12: 2941,2135 2941,2203 ; 2969,2105 3050,2105 ; 3050,2105 3030,2125 3030,2085 3050,2105 ; 2921,2195 2961,2195 2941,2215 2921,2195
  lines w16: 2924,2088 2956,2120 ; 2924,2120 2956,2088
  text "TLM" at 2356.37,2567.98 h25.5 r89.98
  text "FMU PWR" at 1344,2416 h25.5 r90
  text "FMU B/E" at 1504,2416 h25.5 r90
  text "USB" at 2664,2276 h25.5 r90
  text "SER1" at 2364,2192 h25.5 r90
  text "SER2" at 2056,2188 h25.5 r90
  text "POWER" at 3560,2180 h25.5 r90
  text "Y" at 2909,2175 h77.5
  text "SPI" at 3256,2128 h25.5 r90
  text "Z" at 2883,2070 h77.5
  text "X" at 3089,2035 h77.5
  text "SPKT" at 1700,1944 h25.5 r90
  text "SWITCH" at 2056,1732 h25.5 r90
  text "BUZZER" at 1908,1704 h25.5 r90
  text "ADC" at 2664,1684 h25.5 r90
  text "DEBUG" at 2012,1546.61 h25.5 r90
  text "SER4" at 2056,1528 h25.5 r90
  text "PX4FMU 2.4" at 3100,1452 h56.1
  text "(c) 2013 mjs/lm/jo" at 1831,1357 h49.6
  text "IO PWR" at 1344,1320 h25.5 r90
  text "IO B/E" at 1504,1320 h25.5 r90
  text "IO ACT" at 1664,1319 h25.5 r90
  text "AIR" at 3560,1144 h25.5 r90
  text "SER3" at 2360,1132 h25.5 r90
  text "CAN" at 2664,1132 h25.5 r90
  text "I2C" at 3256,1132 h25.5 r90
  text "GPS" at 2313.49,1108.34 h25.5 r89.98
Document:
  text "Optimized for good" at 1389.69,2586.26 h49.6 r270.02
  text "manual soldering" at 1439.84,2548.51 h49.6 r270.02
  text "accessibility" at 1489.47,2435.93 h49.6 r270.02

## Text inside footprints (layer, text, board x,y; h text height)
B601: tDocu "6.8MM" at 1696.76,2102.19 h37.2
U301: bDocu "card IN" at 3755.99,1712.35 h49.6 r269.98; bDocu "card OUT" at 3904.98,1688.68 h49.6 r269.98
U501: tDocu "X" at 3524.44,1452 h17 r270; tDocu "Y" at 3604,1527.62 h17 r270; tDocu "Z" at 3524.44,1531.56 h17 r270
U505: Top Overlay "X" at 3552.57,1744 h10.2 r90.01; Top Overlay "Y" at 3612,1799.37 h10.2 r90.01; Top Overlay "Z" at 3544.69,1803.31 h10.2 r90.01